# EAGLE board basis (EAGLE 6.6.0)
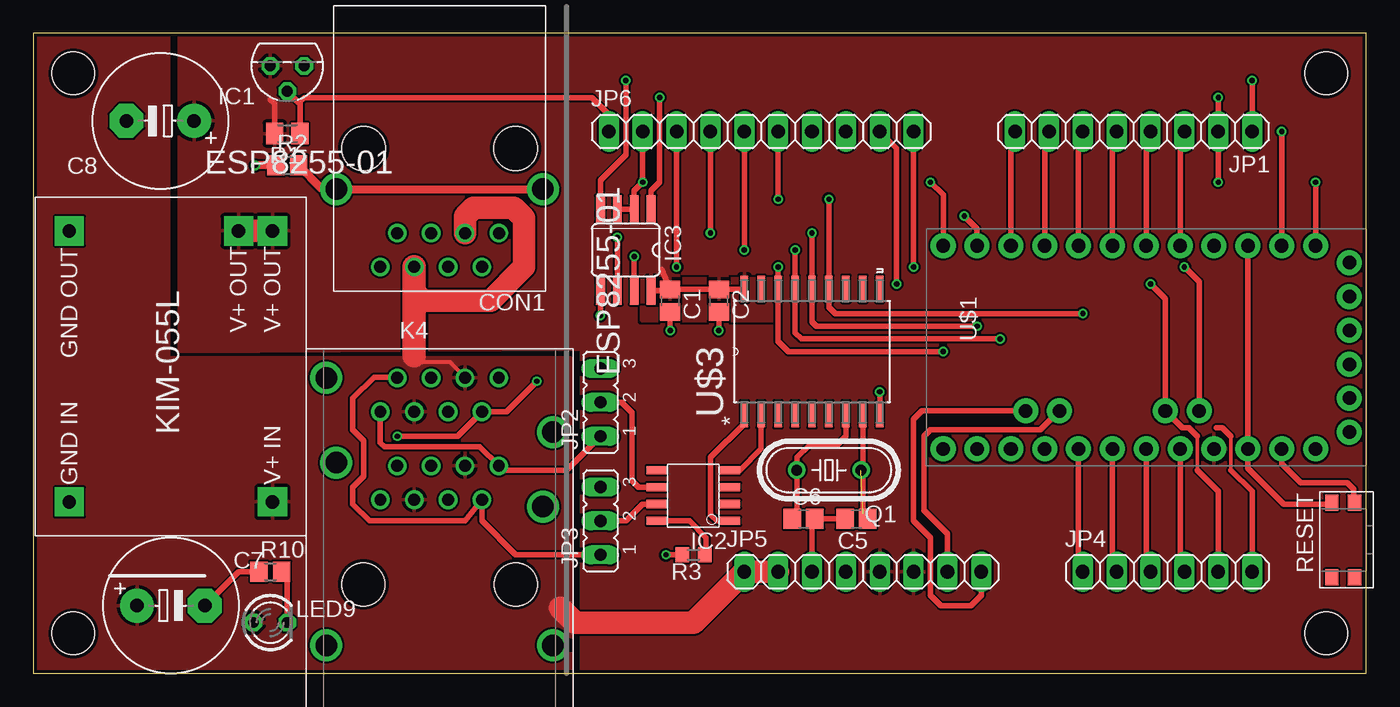
[diagram p0: board, top side]
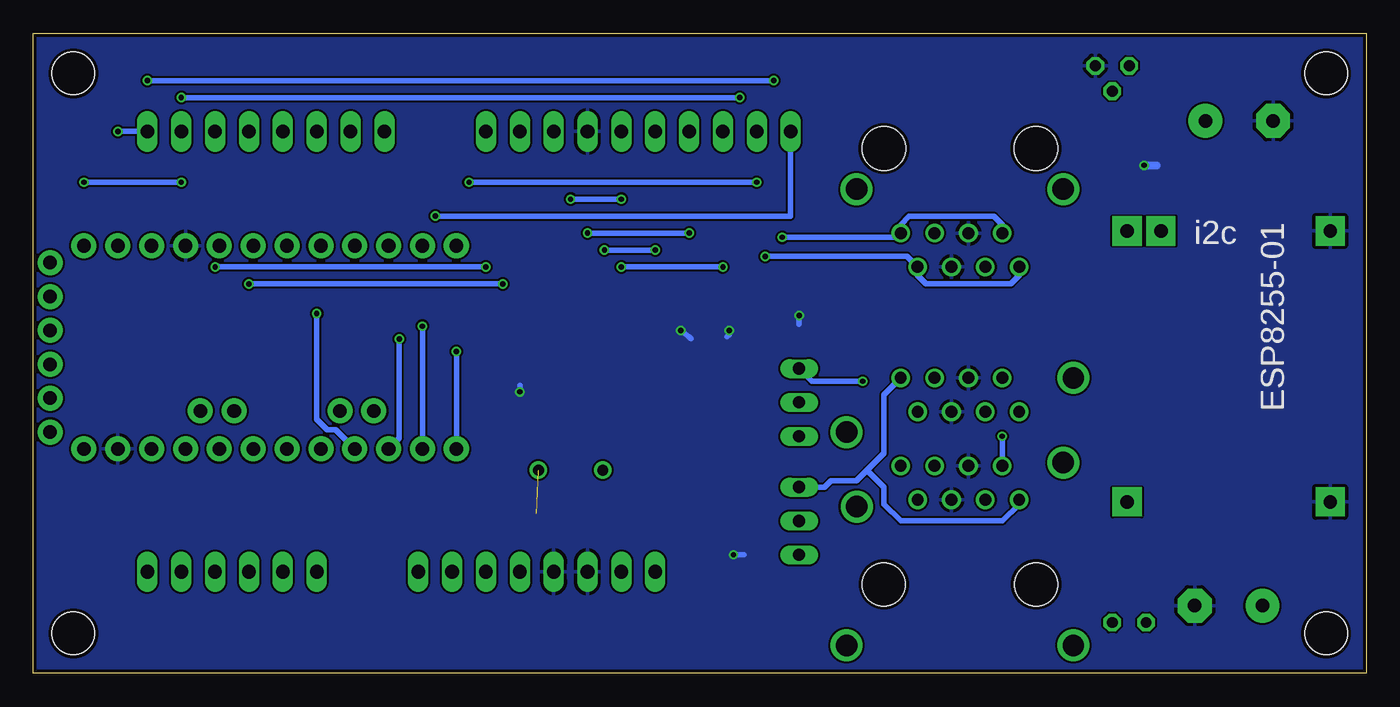
[diagram p1: board, bottom side, seen from below]

Size 100 x 48 mm. Coordinates in mm from the lower left corner, seen from the top.
Outline: 0,0 100,0 100,48 0,48 0,0
Copper layers (1*16): Top 0.035mm / dielectric 1.5mm / Bottom 0.035mm
Design rules "ITEADstudio_DRC": minimum track width 6mil, minimum drill 12mil, track to track 6mil, track to pad 6mil, pad to pad 6mil, via to via 6mil, smd to smd 0mil, copper to edge 10mil, drill to drill 10mil, minimum pad ring 10mil, minimum via ring 6mil, stop-mask expansion 2mil, vias tented up to drill 100mil, thermal gap 10mil
Net classes: 4 USBpair: width 0.254 mm, drill 0.406 mm, clearance 0.508 mm
Holes 3.2 mm at 3,3 3,45 97,45 97,3

## Footprints (pad centres in the part's own frame; a part is rotated, then mirrored left to right if it is on the bottom)
C0805 = smd 1.3 x 1.5: 1 -0.85,0; 2 0.85,0
E5-10,5 = drill 1.016 pad 2.54: + -2.54,0 | drill 1.016 pad 2.54 octagon: - 2.54,0
MEBP = drill 0.9: 1 -4.445,6.35; 2 -3.175,8.89; 3 -1.9,6.35; 4 -0.635,8.89; 5 0.635,6.35; 6 1.9,8.89; 7 3.175,6.35; 8 4.445,8.89 | drill 1.6: T1 -7.75,3.05; T2 7.75,3.05 | hole 3.3: -5.7,0; 5.7,0
TO-92 = drill 0.813 pad 1.27 octagon: 1 -1.27,0; 2 0,1.905; 3 1.27,0
SO-8 = smd 0.61 x 1.524: 1 0,-0.203; 2 1.27,-0.203; 3 2.54,-0.203; 4 3.81,-0.203; 5 3.81,5.283; 6 2.54,5.283; 7 1.27,5.283; 8 0,5.283
SO08 = smd 0.66 x 2.032: 1 -1.905,-3.073; 2 -0.635,-3.073; 3 0.635,-3.073; 4 1.905,-3.073; 5 1.905,3.073; 6 0.635,3.073; 7 -0.635,3.073; 8 -1.905,3.073
1X08 = drill 1.016 long: 1 -8.89,0; 2 -6.35,0; 3 -3.81,0; 4 -1.27,0; 5 1.27,0; 6 3.81,0; 7 6.35,0; 8 8.89,0
JP2 = drill 0.914 long: 1 -2.54,0; 2 0,0; 3 2.54,0
1X06 = drill 1.016 long: 1 -6.35,0; 2 -3.81,0; 3 -1.27,0; 4 1.27,0; 5 3.81,0; 6 6.35,0
1X10 = drill 1.016 long: 1 -11.43,0; 2 -8.89,0; 3 -6.35,0; 4 -3.81,0; 5 -1.27,0; 6 1.27,0; 7 3.81,0; 8 6.35,0; 9 8.89,0; 10 11.43,0
615016240521 = drill 0.89: A1 -4.445,-1.27; A2 -3.175,1.27; A3 -1.905,-1.27; A4 -0.635,1.27; A5 0.635,-1.27; A6 1.905,1.27; A7 3.175,-1.27; A8 4.445,1.27; B1 4.445,7.87; B2 3.175,5.33; B3 1.905,7.87; B4 0.635,5.33; B5 -0.635,7.87; B6 -1.905,5.33; B7 -3.175,7.87; B8 -4.445,5.33 | drill 1.6: Z1 -8.505,-12.19; Z2 8.505,-12.19; Z3 7.745,-1.78; Z4 -7.745,1.52; Z5 8.505,3.81; Z6 -8.505,7.87 | hole 3.25: -5.715,-7.62; 5.715,-7.62
LED3MM = drill 0.813 octagon: A -1.27,0; K 1.27,0
KIM-055L = drill 1 pad 2.184 square: GNDIN -10.16,7.62; GNDOUT 10.16,7.62; V+IN -10.16,-7.62; V+OUT1 10.16,-5.08; V+OUT2 10.16,-7.62
HC49/S = drill 0.813: 1 -2.413,0; 2 2.413,0
M0805 = smd 1.3 x 1.6: 1 -0.95,0; 2 0.95,0
R0805 = smd 1.3 x 1.5: 1 -0.85,0; 2 0.85,0
R0603 = smd 1 x 1.1: 1 -0.85,0; 2 0.85,0
434351045816 = smd 1.2 x 1: 1 2.8,0.85; 2 2.8,-0.85; 3 -2.8,0.85; 4 -2.8,-0.85
ARDUINO_PRO_MINI = drill 1.016 pad 1.88: 1 -7.62,12.7; 2 -7.62,10.16; 3 -7.62,7.62; 4 -7.62,5.08; 5 -7.62,2.54; 6 -7.62,0; 7 -7.62,-2.54; 8 -7.62,-5.08; 9 -7.62,-7.62; 10 -7.62,-10.16; 11 -7.62,-12.7; 12 -7.62,-15.24; 13 7.62,-15.24; 14 7.62,-12.7; 15 7.62,-10.16; 16 7.62,-7.62; 17 7.62,-5.08; 18 7.62,-2.54; 19 7.62,0; 20 7.62,2.54; 21 7.62,5.08; 22 7.62,7.62; 23 7.62,10.16; 24 7.62,12.7; A4 4.763,1.429; A5 4.763,3.969; A6 4.763,-9.049; A7 4.763,-6.509; BLK -6.35,15.24; GND -3.81,15.24; GRN 6.35,15.24; RXI 1.27,15.24; TXO 3.81,15.24; VCC -1.27,15.24
SOIC127P1034X264-18N = smd 1.981 x 0.559: 1 -4.699,5.08; 2 -4.699,3.81; 3 -4.699,2.54; 4 -4.699,1.27; 5 -4.699,0; 6 -4.699,-1.27; 7 -4.699,-2.54; 8 -4.699,-3.81; 9 -4.699,-5.08; 10 4.699,-5.08; 11 4.699,-3.81; 12 4.699,-2.54; 13 4.699,-1.27; 14 4.699,0; 15 4.699,1.27; 16 4.699,2.54; 17 4.699,3.81; 18 4.699,5.08

## Placement (x,y rotation side)
C1  [C0805]  47.78,27.94 270 top
C2  [C0805]  51.44,27.94 270 top
C5  [C0805]  61.75,11.59 180 top
C6  [C0805]  57.78,11.59 0 top
C7  [E5-10,5]  10.32,5.08 0 top
C8  [E5-10,5]  9.53,41.43 180 top
CON1  [MEBP]  30.48,39.37 180 top
IC1  DS1820TO92  [TO-92]  19.05,45.56 180 top
IC2  MCP2551  [SO-8]  52.07,11.43 90 top
IC3  MAX481CSA  [SO08]  44.45,31.75 180 top
JP1  [1X08]  82.55,40.64 180 top
JP2  [JP2]  42.55,20.32 90 top
JP3  [JP2]  42.55,11.43 90 top
JP4  [1X06]  85.09,7.62 0 top
JP5  [1X08]  62.23,7.62 0 top
JP6  [1X10]  54.61,40.64 0 top
K4  615016240521  [615016240521]  30.48,14.29 0 top
LED9  [LED3MM]  17.78,3.81 0 top
MOD1  [KIM-055L]  10.32,23.02 90 top
Q1  [HC49/S]  59.69,15.24 180 top
R1  [M0805]  19.05,40.48 180 top
R2  [R0805]  19.05,38.1 0 top
R3  10k  [R0603]  49.53,8.89 180 top
R10  [R0805]  17.78,7.62 0 top
RESET  434351045816  [434351045816]  98.27,10 90 top
U$1  ARDUINO_PRO_MINI  [ARDUINO_PRO_MINI]  83.5,24.45 270 top
U$3  MCP2515-I/SO  [SOIC127P1034X264-18N]  58.42,24.13 90 top

## Library data of the parts
C1 C2 C5-C8 R1 R2 R10 = schlager_passiv
CON1 = myconn
IC1 = schlager_ics
IC2 = MYMCHIP
IC3 = maxim; MF: MAXIM; MPN: MAX481CSA; OC_FARNELL: unknown; OC_NEWARK: 90C3817
JP1 JP4-JP6 = pinhead
JP2 JP3 = jumper
K4 = Wuerth_Elektronik_eiCan_Communication_Connectors
LED9 = led
MOD1 = kim055l
Q1 = crystal; OC_FARNELL: 1667008; OC_NEWARK: unknown
R3 = rcl
RESET = Illuminated_Switches
U$1 = SparkFun-Boards
U$3 = schlager_ics; MPN: MCP2515-I/SO; OC_FARNELL: 1292239; OC_NEWARK: 29H7136; PACKAGE: SOIC-18; SUPPLIER: Microchip

## Nets
A0: JP4.1 U$1.17
A1: JP4.2 U$1.18
A2: JP4.3 U$1.19
A3_V24: JP4.4 U$1.20
A4_SDA: JP4.5 JP6.9 U$1.A4
A5: JP4.6
A5_SCL: JP6.10 U$1.A5
A6: JP5.8 U$1.A6
A7: JP5.7 U$1.A7
AREF: JP6.8
CANH: IC2.7 JP3.2
CANH1: JP3.3 K4.A1 K4.B1
CANH2: JP3.1 K4.A7 K4.B7
CANL: IC2.6 JP2.2
CANL1: JP2.3 K4.A2 K4.B2
CANL2: JP2.1 K4.A8 K4.B8
CANRX: IC2.4 U$3.2
CANTX: IC2.1 U$3.1
D2: JP1.3 U$1.5
D3: JP1.4 U$1.6
D4: JP1.5 U$1.7
D5: JP1.6 U$1.8
D6: JP1.7 U$1.9
D7: JP1.8 U$1.10
D8: IC1.2 JP6.1 R1.1 U$1.11
D9: IC3.2 IC3.3 JP6.2 U$1.12
D10_SS: JP6.3 U$1.13 U$3.16
D11_MOSI: JP6.4 U$1.14 U$3.14
D12_MISO: JP6.5 U$1.15 U$3.15
D13_SCK: JP6.6 U$1.16 U$3.13
GND: C1.2 C2.2 C5.2 C6.2 C7.- C8.- CON1.4 CON1.5 IC1.1 IC3.5 JP5.3 JP5.4 JP6.7 K4.A4 K4.A5 K4.B4 K4.B5 MOD1.GNDIN MOD1.GNDOUT R2.1 R3.2 R10.1 RESET.2 U$1.4 U$1.23 U$3.9
MCP_OSC1: C5.1 Q1.1 U$3.8
MCP_OSC2: C6.1 Q1.2 U$3.7
N$2: IC2.8 R3.1
N$3: CON1.T1 CON1.T2 R2.2
N$9: LED9.K R10.2
P5V: C1.1 C2.1 C8.+ IC1.3 IC3.8 JP5.5 JP5.6 MOD1.V+OUT1 MOD1.V+OUT2 R1.2 U$1.21 U$3.18
P24P: C7.+ CON1.3 CON1.6 JP5.1 JP5.2 K4.A3 K4.A6 K4.B3 K4.B6 LED9.A MOD1.V+IN
RESET: RESET.1 U$1.3 U$1.22
RS485_A: CON1.1 CON1.7 IC3.6
RS485_B: CON1.2 CON1.8 IC3.7
RX: IC3.4 JP1.1 U$1.2
TX: IC3.1 JP1.2 U$1.1

## Tracks (layer width: path | path; a pad name or v marks a point on that pad's centre or on a via)
A0
  Top 0.406: U$1.17 78.42,7.94 JP4.1
A1
  Top 0.406: U$1.18 80.96,7.94 JP4.2
A2
  Top 0.406: U$1.19 83.5,7.94 JP4.3
A3_V24
  Top 0.406: U$1.20 86.04,7.94 JP4.4
A4_SDA  (via drill 0.4)
  Top 0.254: 87.31,15.24 87.31,17.78
  Top 0.406: JP4.5 88.9,13.65 87.31,15.24 | 87.31,17.78 86.68,18.41 86.2,18.41 U$1.A4 84.93,28.1 v83.82,29.21 | JP6.9 64.77,39.37 v64.77,29.21
  Bottom 0.406: v64.77,29.21 v83.82,29.21
A5
  Top 0.254: 89.85,15.24 89.85,17.78
  Top 0.406: JP4.6 91.44,13.65 89.85,15.24 | 89.85,17.78 89.22,18.41 88.74,18.41
A5_SCL  (via drill 0.4)
  Top 0.406: JP6.10 v66.04,30.48 | U$1.A5 87.47,29.37 v86.36,30.48
  Bottom 0.406: v66.04,30.48 v86.36,30.48
A6
  Top 0.406: U$1.A6 66.67,19.68 66.04,19.05 66.04,11.43 67.31,10.16 67.31,5.87 68.1,5.08 70.33,5.08 71.12,5.87 JP5.8
A7
  Top 0.406: JP5.7 68.58,10.48 66.83,12.22 66.83,17.78 67.31,18.26 75.56,18.26 U$1.A7
CANH
  Top 0.406: JP3.2 44.45,11.43 45.72,12.7 IC2.7
CANH1
  Bottom 0.406: JP3.3 40.64,13.97 40.16,14.45 38.26,14.45 37.47,15.24 | 37.47,15.24 36.2,16.51 36.2,20.89 K4.B1 | K4.A1 26.04,12.7 27.3,11.43 34.92,11.43 36.2,12.7 36.2,13.97 37.47,15.24
CANH2
  Top 0.406: JP3.1 36.2,8.89 33.66,11.43 K4.A7 32.38,11.43 25.24,11.43 23.97,12.7 23.97,13.97 24.77,14.76 24.77,17.46 23.97,18.26 23.97,20.64 25.56,22.23 27.24,22.23 K4.B7
CANL
  Top 0.406: IC2.6 45.4,13.97 44.93,14.45 44.93,19.53 44.13,20.32 JP2.2
CANL1  (via drill 0.4)
  Top 0.406: v27.3,17.78 31.82,17.78 K4.B2 35.49,19.62 v37.78,21.91
  Bottom 0.406: K4.A2 v27.3,17.78 | v37.78,21.91 41.59,21.91 JP2.3
CANL2
  Top 0.406: JP2.1 40.01,15.24 35.24,15.24 K4.A8 33.5,16.99 26.35,16.99 26.04,17.3 K4.B8
CANRX
  Top 0.406: IC2.4 53.02,15.24 54.61,16.83 U$3.2
CANTX
  Top 0.406: U$3.1 53.34,18.73 50.8,16.19 50.8,11.91 51.28,11.43 IC2.1
D2
  Top 0.406: U$1.5 86.04,40.32 JP1.3
D3
  Top 0.406: U$1.6 83.5,40.32 JP1.4
D4
  Top 0.406: U$1.7 80.96,40.32 JP1.5
D5
  Top 0.406: U$1.8 78.42,40.32 JP1.6
D6
  Top 0.406: U$1.9 75.88,40.32 JP1.7
D7
  Top 0.406: U$1.10 73.34,40.32 JP1.8
D8  (via drill 0.4)
  Top 0.406: U$1.11 70.8,33.34 v69.85,34.29 | R1.1 20,42.71 19.92,42.78 | 19.92,42.78 IC1.2 | JP6.1 43.18,41.91 41.91,43.18 20.32,43.18 19.92,42.78
  Bottom 0.406: v69.85,34.29 43.18,34.29 JP6.1
D9  (via drill 0.4)
  Top 0.406: U$1.12 68.26,35.88 v67.31,36.83 | JP6.2 v45.72,36.83 45.09,36.2 IC3.2 IC3.3
  Bottom 0.406: v67.31,36.83 v45.72,36.83
D10_SS  (via drill 0.4)
  Top 0.406: v68.26,24.13 56.67,24.13 55.88,24.92 U$3.16 v55.88,30.48 | v48.26,30.48 JP6.3
  Bottom 0.406: U$1.13 v68.26,24.13 | v55.88,30.48 v48.26,30.48
D11_MOSI  (via drill 0.4)
  Top 0.406: v70.8,26.04 58.74,26.04 58.42,26.35 U$3.14 v58.42,33.02 | v50.8,33.02 JP6.4
  Bottom 0.406: v70.8,26.04 U$1.14 | v58.42,33.02 v50.8,33.02
D12_MISO  (via drill 0.4)
  Top 0.406: v72.55,25.08 57.63,25.08 57.15,25.56 U$3.15 v57.15,31.75 | v53.34,31.75 JP6.5
  Bottom 0.406: v72.55,25.08 72.55,17.62 U$1.15 | v57.15,31.75 v53.34,31.75
D13_SCK  (via drill 0.4)
  Top 0.406: v78.74,26.99 60.17,26.99 59.69,27.46 U$3.13 v59.69,35.56 | v55.88,35.56 JP6.6
  Bottom 0.406: v78.74,26.99 78.74,19.05 77.95,18.26 77.31,18.26 U$1.16 | v59.69,35.56 v55.88,35.56
GND  (via drill 0.4)
  Top 0.406: R10.1 15.4,7.62 C7.- | U$1.23 93.66,15.72 95.09,14.29 98.58,14.29 99.06,13.81 99.06,12.86 RESET.2 | C2.2 v51.44,25.72 | U$3.9 v63.5,21.11 | IC3.5 v42.55,26.83 | R3.2 v47.47,8.89 | JP5.3 58.42,11.37 C6.2 C5.2 | C1.2 v47.78,25.72
  Top 0.61: R2.1 v16.67,38.1
  Bottom 0.406: v51.44,25.72 50.8,25.24 50.64,25.08 | v63.5,21.11 63.5,21.59 | v42.55,26.83 42.55,26.19 | v47.47,8.89 46.67,8.89 | v47.78,25.72 47.78,25.4 47.94,25.24
  Bottom 0.61: v16.67,38.1 15.72,38.1
  pour Bottom: -8.89,72.39 120.65,72.39 120.65,-13.97 -8.89,-13.97
MCP_OSC1  (1 unrouted)
  Top 0.406: U$3.8 62.23,11.96 C5.1
MCP_OSC2
  Top 0.406: C6.1 57.28,11.93 Q1.2 57.31,15.27 57.31,16.19 58.26,17.14 60.33,17.14 60.96,17.78 U$3.7
N$1
  pour Top: 45.72,29.53 45.72,26.51 55.56,26.51 55.56,29.53
N$2
  Top 0.406: IC2.8 49.21,11.43 50.48,10.16 50.48,8.99 R3.1
N$3
  Top 0.61: R2.2 21.68,36.32 CON1.T2 CON1.T1
N$9
  Top 0.406: LED9.K 19.05,7.2 R10.2
P5V
  Top 0.406: U$3.18 53.3,28.79 C2.1 C1.1 | C1.1 47.68,28.79 47.57,28.68 IC3.8 | C1.1 47.15,30.32 | R1.2 18.1,42.7 17.78,43.02
  Top 1.676: MOD1.V+OUT1 MOD1.V+OUT2
  pour Top (rank 5): 10.95,68.58 109.22,68.58 109.22,-13.97 41.12,-13.81 41.12,24.29 10.95,24.13
P24P
  Top 0.305: K4.B3 32.38,22.23 31.27,23.34 29.05,23.34 28.57,23.81
  Top 1.676: JP5.2 JP5.1 49.53,3.81 40.64,3.81 39.53,4.92 | CON1.6 28.58,28.57 29.21,27.94 34.29,27.94 36.83,30.48 36.83,34.13 36.04,34.92 33.02,34.92 32.38,34.29 CON1.3
  Top 1.778: CON1.6 28.58,23.82 28.57,23.81
  pour Top (rank 5): -16.51,68.58 10.16,68.58 10.16,23.65 40.32,23.65 40.32,-15.24 -16.51,-15.24
RESET
  Top 0.406: RESET.1 97.63,12.7 93.82,12.7 91.12,15.4 U$1.22 U$1.3
RS485_A  (via drill 0.4)
  Top 0.406: IC3.6 v43.81,32.7
  Bottom 0.406: CON1.7 27.3,33.66 27.94,34.29 34.29,34.29 34.92,33.66 CON1.1 35.24,32.7 v43.81,32.7
RS485_B  (via drill 0.4)
  Top 0.406: IC3.7 v45.09,31.27
  Bottom 0.406: CON1.8 26.04,29.84 26.67,29.21 33.02,29.21 33.66,29.84 CON1.2 34.45,31.27 v45.09,31.27
RX  (via drill 0.4)
  Top 0.406: U$1.2 v93.66,40.64 | IC3.4 42.55,36.99 44.45,38.89 v44.45,44.45 | v91.44,44.45 JP1.1
  Bottom 0.406: v44.45,44.45 v91.44,44.45 | v93.66,40.64 JP1.1
TX  (via drill 0.4)
  Top 0.406: U$1.1 v96.2,36.83 | IC3.1 46.35,36.2 46.99,36.83 v46.99,43.18 | v88.9,43.18 JP1.2 v88.9,36.83
  Bottom 0.406: v46.99,43.18 v88.9,43.18 | v96.2,36.83 v88.9,36.83

## Text on the board
tNames: ESP8255-01 | ESP8255-01
bNames: ESP8255-01 | i2c